# Altium PCB PCB_Cong_suat.PcbDoc
Units mil, origin at the board's own origin, x right, y up, seen from the top; angles counter-clockwise.
Board outline 3920 x 3890 mil, 2 copper layers (Top Layer, Bottom Layer); 52 components, 42 nets, 174 pads, 40 vias.
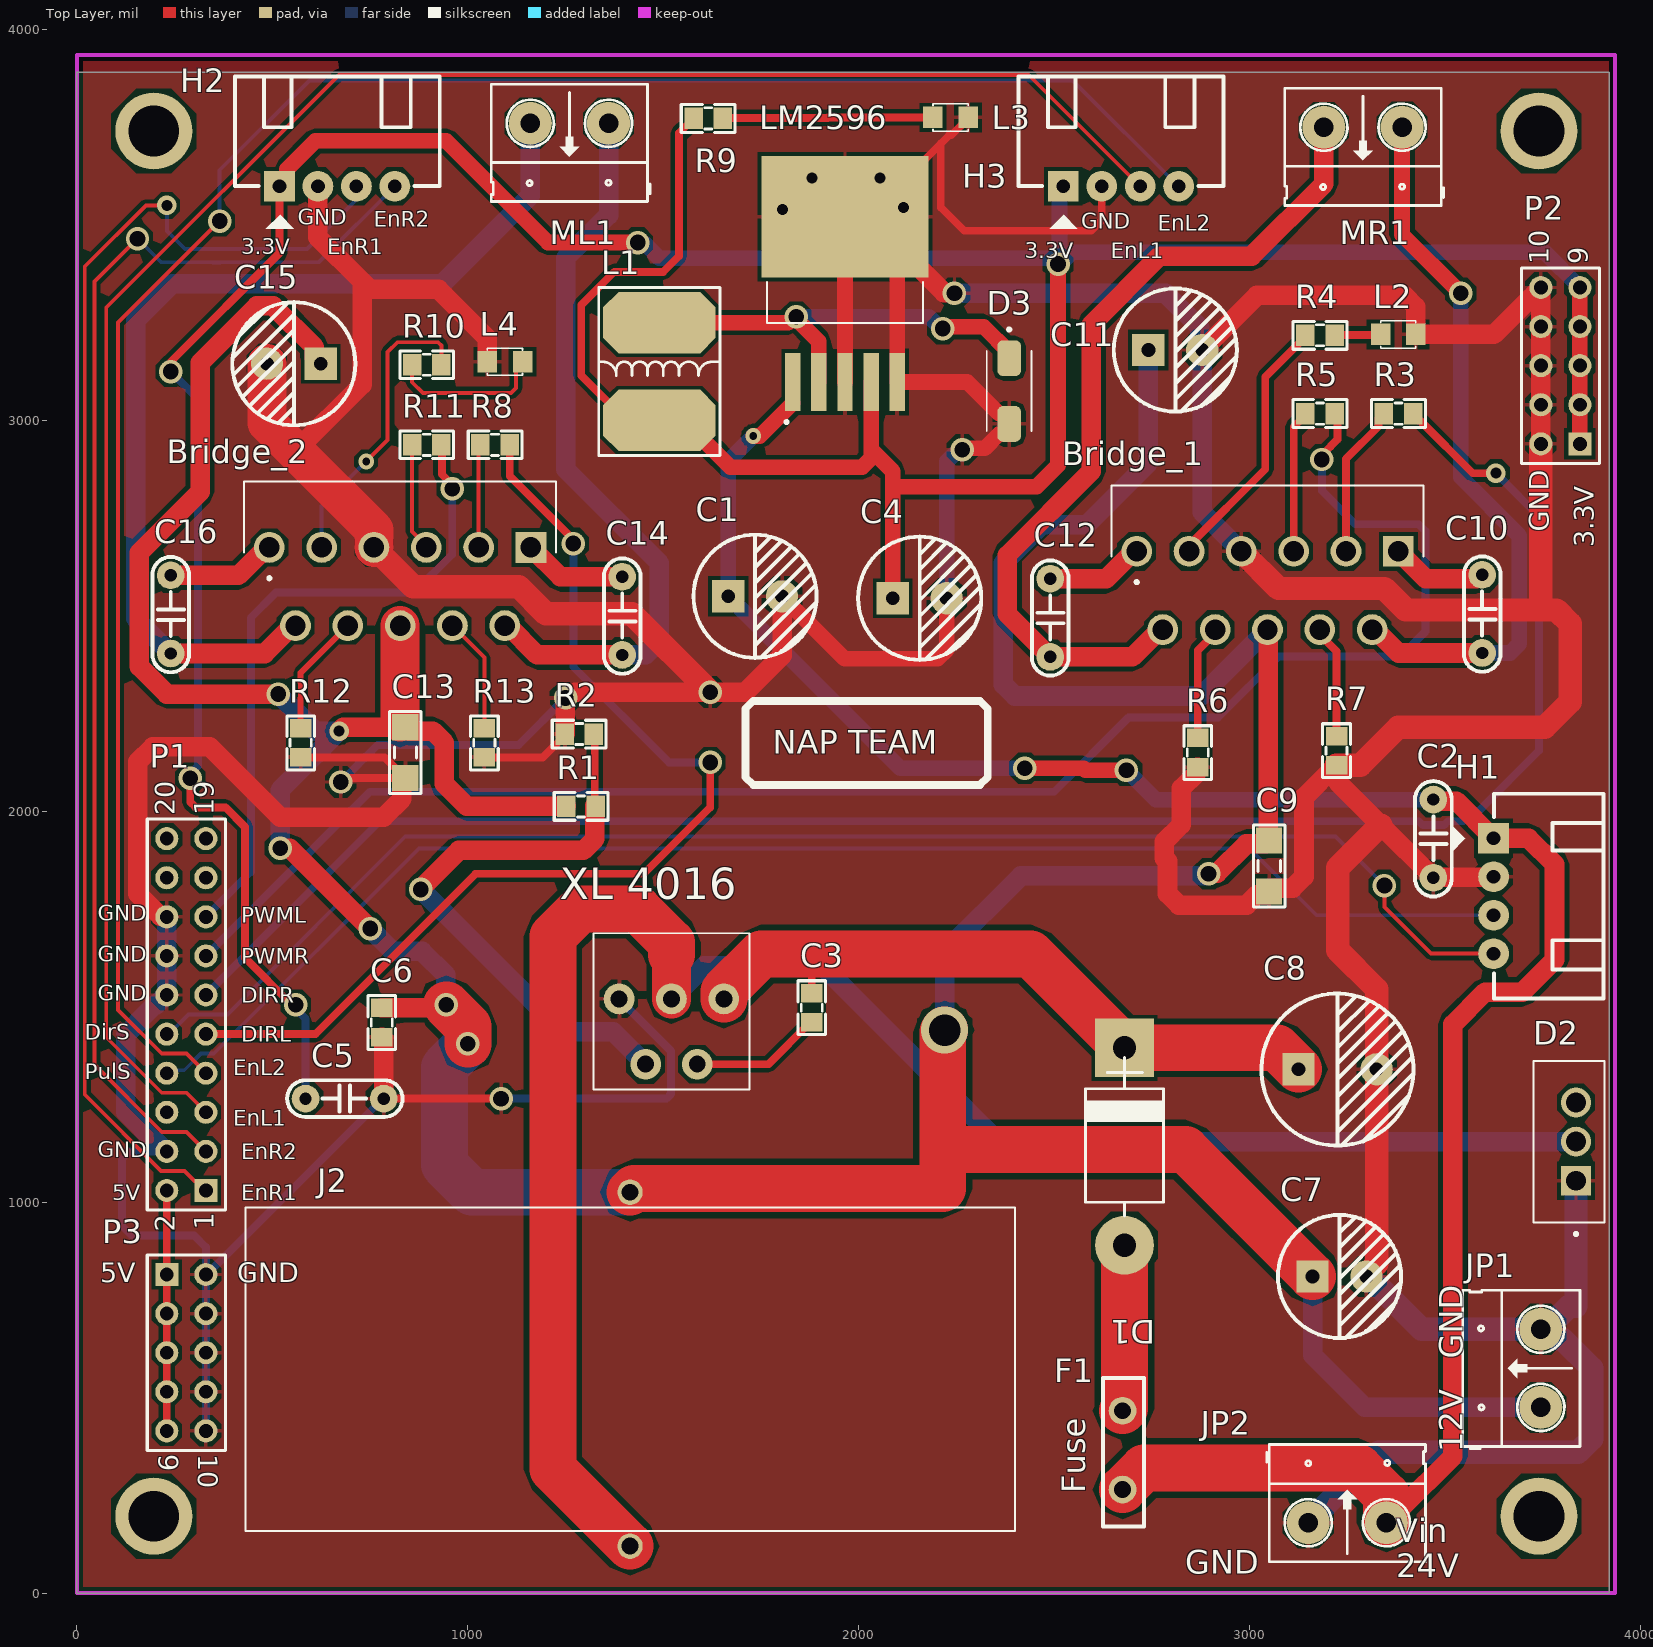
[diagram p0: Top Layer view]
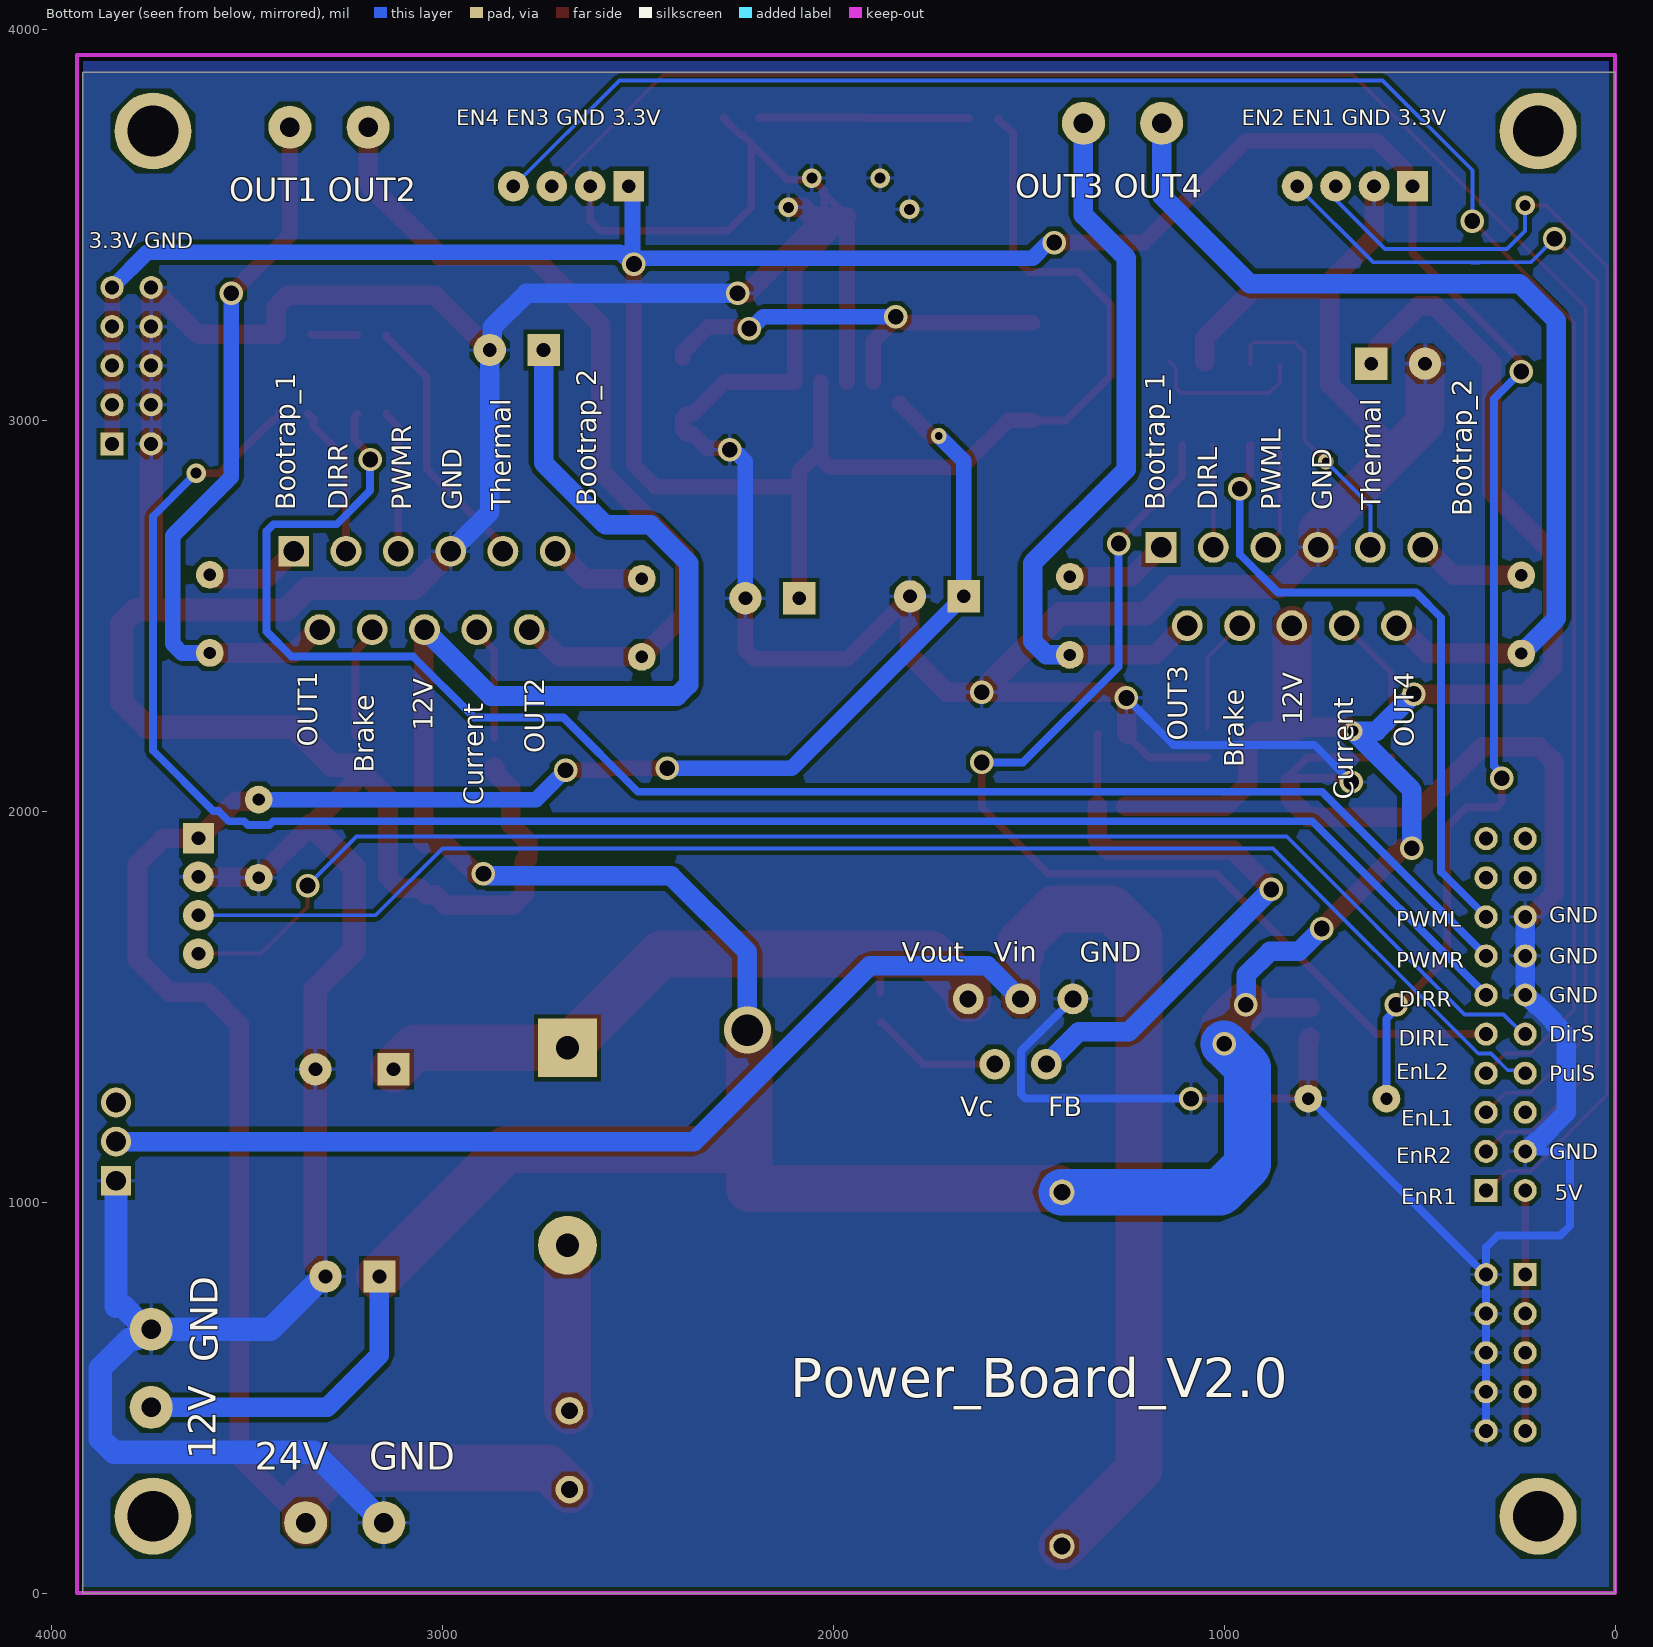
[diagram p1: Bottom Layer view, seen from below]
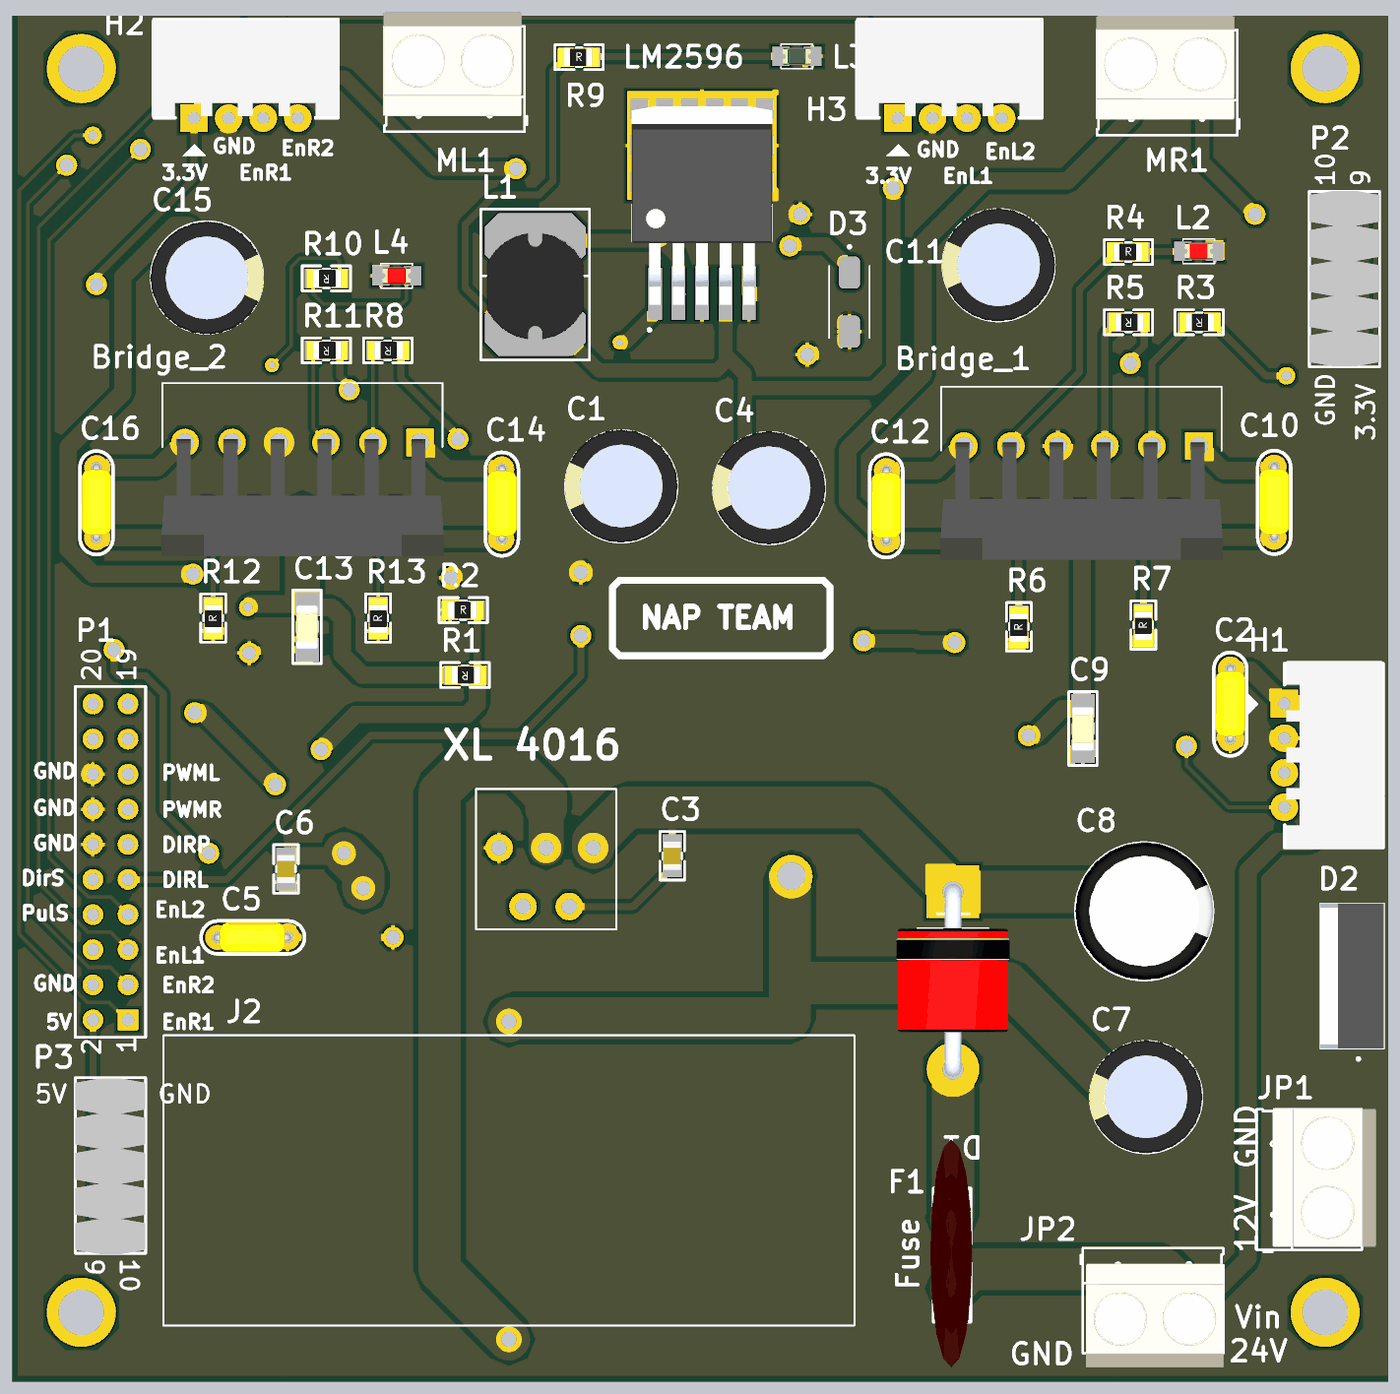
[diagram p2: 3D render of the assembled board from above, using the file's embedded part models]

## Layer stack, top to bottom
Top Solder: solder mask 0.4, Solder Resist, Dk 3.5
Top Layer: signal copper 1.4
Dielectric 1: dielectric 12.6, FR-4, Dk 4.8
Bottom Layer: signal copper 1.4
Bottom Solder: solder mask 0.4, Solder Resist, Dk 3.5

## Board outline
0,0 3920,0 3920,3890 0,3890

## Design rules (kind name [scope] priority, off if disabled: settings)
Clearance [All] p1: gap=10 ignorepadtopadclearanceinfootprint=FALSE
Height [All] p1: minheight=0 maxheight=5000 prefheight=500
PolygonConnect [All] p1: connectstyle=Relief reliefconductorwidth=10 reliefentries=4 polygonreliefangle="90 Angle" airgapwidth=10
RoutingVias [All] p1: holewidth=40 width=60 viastyle="Through Hole" minholewidth=40 minwidth=60 maxholewidth=40 maxwidth=60
SolderMaskExpansion [All] p1: expansion=4 istentingtop=FALSE
Width [All] p1: maxlimit=150 minlimit=10 preferedwidth=40
29 further rules are at their usual default settings.

## Components (designator, comment, footprint, x,y, rotation, side; value= is the part's Value field where it differs from the comment)
Bridge_1 "LMD18200T/NOPB" LMD18200 2711.14,2665 r0 top
Bridge_2 "LMD18200T/NOPB" LMD18200 492.28,2675 r0 top
C1 "470uF" "tu hoa 8mm" 1735,2550 r0 top
C2 "100nF" "tu tantalum dip5.08" 3470,1930 r270 top
C3 "105" "tu 0805" 1880.13,1497.57 r270 top
C4 "470uF" "tu hoa 8mm" 2156.1,2545 r0 top
C5 "100nF" "tu tantalum dip5.08" 685,1265 r0 top
C6 "105" "tu 0805" 780,1460 r270 top
C7 "1000uF" "tu hoa 8mm" 3230,810 r0 top
C8 "470uF" "tu hoa 10mm" 3225,1340 r0 top
C9 "100pF" "tu 1206" 3050,1860 r270 top
C10 "10nF" "tu tantalum dip5.08" 3595,2505 r270 top
C11 "220uF" "tu hoa 8mm" 2810,3180 r0 top
C12 "10nF" "tu tantalum dip5.08" 2490,2495 r270 top
C13 "100pF" "tu 1206" 840,2150 r270 top
C14 "10nF" "tu tantalum dip5.08" 1395,2500 r270 top
C15 "220uF" "tu hoa 8mm" 555,3145 r180 top
C16 "10nF" "tu tantalum dip5.08" 240,2503.68 r270 top
D1 "6A 1000V" "DIODE 7A" 2680,1120 r270 top
D2 "MBR10100CTH" TO254P1050X476X2020-3 3817.15,1155 r90 top
D3 "B340A-13-F" DIOM5226X240N 2385,3075 r270 top
F1 "10A 16V" Auto_Fuse 2675,250 r90 top
H1 "Stepper" "Header 4P DC 2.54" 3625,1930 r0 top
H2 "Encoder_R" "Header 4P DC 2.54" 519.15,3600 r90 top
H3 "Encoder_R" "Header 4P DC 2.54" 2524.15,3600 r90 top
J2 "470uH" DTPUA10 1415,120 r90 top
JP1 "Header 2_1" HED2 3745,475 r90 top value="Header 2"
JP2 "Header 2_1" HED2 3150,180 r0 top value="Header 2"
L1 "33uH SMD" "Cuon Cam 7x7x5" 1490,3275 r180 top
L2 "LED 0805" LED-0805-Red 3335,3220 r0 top
L3 "LED 0805" LED-0805-Green 2190,3775 r0 top
L4 "LED 0805" LED-0805-Red 1140,3150 r180 top
LM2596 "LM2596S-3.3V" TO170P1524X483-6N 1965,3350 r90 top (schematic designator VR1)
ML1 "Header 2_1" HED2 1360,3760 r180 top value="Header 2"
MR1 "Header 2_1" HED2 3390,3750 r180 top value="Header 2"
P1 "Header 10X2" HDR2X10 330,1030 r90 top
P2 "Header 5X2" HDR2X5 3845,2940 r90 top
P3 "Header 5X2" HDR2X5 230,815 r270 top
R1 "15k" "tro smd 0805" 1290,2010 r180 top
R2 "1.8k" "tro smd 0805" 1285,2200 r0 top
R3 "3.3k" "tro smd 0805" 3381.17,3015 r180 top
R4 "330R" "Tro SMD 0805" 3180,3220.06 r0 top
R5 "3.3k" "tro smd 0805" 3180,3015 r180 top
R6 "10k" "tro smd 0805" 2865,2150 r90 top
R7 "3.3k" "tro smd 0805" 3220,2155 r90 top
R8 "3.3k" "tro smd 0805" 1070,2935 r180 top
R9 "330R" "Tro SMD 0805" 1615,3775 r0 top
R10 "330R" "Tro SMD 0805" 895,3140 r180 top
R11 "3.3k" "tro smd 0805" 895,2935 r180 top
R12 "10k" "tro smd 0805" 570,2175 r90 top
R13 "3.3k" "tro smd 0805" 1040,2175 r90 top
"XL 4016" "XL4016" LM2576T2 1521,1520 r0 top (schematic designator J1)

## Footprints (in the part's own frame and the unit in brackets; to place one, negate y for a bottom-side part, rotate by r counter-clockwise, add the part's x,y. Pads: shape width x height; smd on the part's side, far side on the other; paste and mask are expansions set on the pad)
Auto_Fuse [mm]
  round 1.8 hole 1.1: 1(0.381,0) 2(5.5,0)
  silkscreen extent -2.03,-1.4 7.62,1.27, body extent -5.33,-1.52 11.18,1.52, height 26.91
"Cuon Cam 7x7x5" [mm] "Cuon Cam 7x7x5"
  oct 7.3x4 smd: 1(0,0.635) 2(0,6.985)
  silkscreen extent -3.94,-1.65 3.94,9.27, body extent -3.5,0.07 3.5,7.8, height 5.02
"DIODE 7A" [mil] "Diode 7A"
  round 150 hole 60: 1(230,0)
  rect 150x150 hole 60: 2(-275,0)
  silkscreen extent -250,-100 155,100, body extent -296,-161 251,161, height 319
DIOM5226X240N [mm]
  rrect50% 2.33x1.55 smd: A(2.135,0) C(-2.135,0)
  silkscreen extent -4.1,-1.46 2.6,1.46
DTPUA10 [mm]
  round 1.65 hole 1.1: P$1(0,0) P$2(23,0)
  silkscreen extent 1,-25 22,25
HDR2X5 [mm] "Connector; Header; 5x2 Position"
  rect 1.5x1.5 hole 0.9: 1(0,0)
  round 1.5 hole 0.9: 2(0,2.54) 3(2.54,0) 4(2.54,2.54) 5(5.08,0) 6(5.08,2.54) 7(7.62,0) 8(7.62,2.54) 9(10.16,0) 10(10.16,2.54)
  silkscreen extent -1.27,-1.27 11.43,3.81, body extent -1.22,-1.28 11.48,3.8, height 9.27
HDR2X10 [mm] "Connector; Header; 10x2 Position"
  rect 1.5x1.5 hole 0.9: 1(0,0)
  round 1.5 hole 0.9: 2(0,2.54) 3(2.54,0) 4(2.54,2.54) 5(5.08,0) 6(5.08,2.54) 7(7.62,0) 8(7.62,2.54) 9(10.16,0) 10(10.16,2.54) 11(12.7,0) 12(12.7,2.54) 13(15.24,0) 14(15.24,2.54) 15(17.78,0) 16(17.78,2.54) 17(20.32,0) 18(20.32,2.54) 19(22.86,0) 20(22.86,2.54)
  silkscreen extent -1.27,-1.27 24.13,3.81
"Header 4P DC 2.54" [mil]
  rect 78.74x78.74 hole 35: 1(-1,1)
  round 78.74 hole 35: 2(-1,-97.42) 3(-1,-195.85) 4(-1,-294.28)
  silkscreen extent -110,-409 280,115, body extent 5,-413 278,123, height 290
HED2 [mil] "Header 2, 2 pin, hight 300mil, Pin to Pin 200, Colour Green"
  round 110 hole 50: 1(0,0) 2(200,0)
  silkscreen extent -106,-100 300,200, body extent -92,-140 302,155, height 394
LED-0805-Green [mil]
  rect 50x55 smd: 1(0,0) 2(90,0)
  silkscreen extent 0,-35 90,35, body extent 5,-25 85,25, height 43
LED-0805-Red [mil]
  rect 50x55 smd: 1(0,0) 2(90,0)
  silkscreen extent 0,-35 90,35, body extent 5,-25 85,25, height 43
LM2576T2 [mm]
  round 2 hole 1.1: 1(-3.404,0) 2(-1.676,-4.242) 3(0,0) 4(1.676,-4.242) 5(3.404,0)
  silkscreen extent -5.08,-5.89 5.08,4.27
LMD18200 [mm]
  rect 2x2 hole 1.33: 1(17,0)
  round 2 hole 1.33: 2(15.3,-5.08) 3(13.6,0) 4(11.9,-5.08) 5(10.2,0) 6(8.5,-5.08) 7(6.8,0) 8(5.1,-5.08) 9(3.4,0) 10(1.7,-5.08) 11(0,0)
  silkscreen extent -1.64,-2.1 18.64,4.29, body extent -1.69,-8.24 18.71,0.25, height 17.79
TO170P1524X483-6N [mm]
  rect 3.79x0.99 smd: 1(-6.4,3.4) 2(-6.4,1.7) 3(-6.4,0) 4(-6.4,-1.7) 5(-6.4,-3.4)
  rect 7.88x10.84 smd paste-6: 6(4.35,0)
  silkscreen extent -9.1,-5.08 0.09,5.08, body extent -7.18,-5.08 7.18,5.08, height 4.65
TO254P1050X476X2020-3 [mm]
  rect 1.94x1.94 hole 1.29: 1(-2.54,-0.453)
  round 1.94 hole 1.29: 2(0,-0.453) 3(2.54,-0.453)
  silkscreen extent -6.1,-2.29 5.25,2.29, body extent -5.25,-2.29 5.25,2.3, height 20.2
"tro smd 0805" [mm]
  rect 1.2x1.4 smd: 1(-0.946,-0.061) 2(0.954,-0.061)
  silkscreen extent -1.75,-0.97 1.75,0.84, body extent -1.56,-0.76 1.44,0.64, height 0.53
"Tro SMD 0805" [mm]
  rect 1.2x1.4 smd: 1(-0.946,-0.061) 2(0.954,-0.061)
  silkscreen extent -1.75,-0.97 1.75,0.84, body extent -1.56,-0.76 1.44,0.64, height 0.53
"tu 0805" [mm] "Compoment SMD 80x50mil"
  rect 1.2x1.4 smd: 1(-0.946,-0.003) 2(0.954,-0.003)
  silkscreen extent -1.75,-0.89 1.75,0.89, body extent -1.01,-0.64 1.01,0.63, height 0.61
"tu 1206" [mm]
  rect 1.7x1.7 smd: 1(-1.65,0) 2(1.65,0)
  silkscreen extent -2.67,-1.02 2.67,1.02, body extent -1.57,-0.8 1.63,0.8, height 0.94
"tu hoa 8mm" [mm]
  rect 2.1x2.1 hole 0.9: 1(-1.75,0)
  round 2.1 hole 0.9: 2(1.75,0)
  silkscreen extent -4,-4 4,4, body extent -4.1,-4.07 4.1,4.13, height 13.81
"tu hoa 10mm" [mm]
  rect 2.1x2.1 hole 0.9: 1(-2.54,0)
  round 2.1 hole 0.9: 2(2.54,0)
  silkscreen extent -4.95,-4.96 4.93,4.92, body extent -5,-5 4.97,5, height 20.01
"tu tantalum dip5.08" [mm]
  round 1.8 hole 0.8: 1(-2.54,0) 2(2.54,0)
  silkscreen extent -3.74,-1.2 3.76,1.2, body extent -2.82,-1.08 2.77,1.08, height 6.27

## Part data
Bridge_1 Bridge_2: Package=None, Availability=Unavailable, MP=LMD18200T/NOPB, Price=None
C1 C4: library part "Tu Hoa 470uF 16V 8x11", "Cắm", Chung_Loai=Cắm, Don_Vi=Con, Ma_Hang=MH006550, So_Chan=2, Ten_Linh_Kien="Tụ Hóa 470uF 16V 8x11MM"
C2 C5: library part "Tu tantalum 100nF 50V 20% DIP5.08", "Cắm", Chung_Loai=Cắm, Don_Vi=Con, Ma_Hang=MH003955, So_Chan=2, Ten_Linh_Kien="Tụ tantalum 104-100nF 50V 20% DIP5.08 (sứ vàng)(10PCS)"
C3 C6: library part "Tu 0805 105 50V 10%", "Dán", Chung_Loai=Dán, Don_Vi=Con, Ma_Hang=MH004552, So_Chan=2, Ten_Linh_Kien="Tụ 0805 105-1uF 10% 50V"
C7: library part "Tu Hoa 1000uF 16V 8x20", "Cắm", Chung_Loai=Cắm, Don_Vi=Con, Ma_Hang=MH008300, So_Chan=2, Ten_Linh_Kien="Tụ Hóa 1000uF 16V 8x20MM"
C8: library part "Tu Hoa 470uF 35V 10x15", "Cắm", Chung_Loai=Cắm, Don_Vi=Con, Ma_Hang=MH002204, So_Chan=2, Ten_Linh_Kien="Tụ Hóa 470uF 35V 10x15MM"
C9 C13: library part "Tu 1206 100pF 50V 5%", "Dán", Chung_Loai=Dán, Don_Vi=Con, Ma_Hang=MH008101, So_Chan=2, Ten_Linh_Kien="Tụ 1206 100P 5% 50V"
C10 C12 C14 C16: library part "Tu tantalum 10nF DIP5.08", "Cắm", Chung_Loai=Cắm, Don_Vi=Con, Ma_Hang=MH002105, So_Chan=2, Ten_Linh_Kien="Tụ tantalum 103-10nF DIP5.08 (sứ vàng)(10PCS)"
C11 C15: library part "Tu Hoa 220uF 35V 8x12", "Cắm", Chung_Loai=Cắm, Don_Vi=Con, Ma_Hang=MH006553, So_Chan=2, Ten_Linh_Kien="Tụ Hóa 220uF 35V 8x12MM"
D1: library part "Diode 6A 1000V", "Cắm", Chung_Loai=Cắm, Don_Vi=Con, Ma_Hang=MH006103, Ten_Linh_Kien="Diode 6A10 6A 1000V (DIP)"
D2: "10A, 100V, Schottky Rectifier", Package="TO-220AB Taiwan Semiconductor", Availability="Not in stock", Check_prices=https://www.snapeda.com/parts/MBR10100CTH/Taiwan+Semiconductor/view-part/?ref=eda, MF="Taiwan Semiconductor", MP=MBR10100CTH, Price=None, SnapEDA_Link=https://www.snapeda.com/parts/MBR10100CTH/Taiwan+Semiconductor/view-part/?ref=snap
D3: "Diode Schottky 40V 3A Surface Mount SMA", Package="DO-214 Diodes Inc.", Availability=Unavailable, MF="Diodes Inc.", MP=B340A-13-F, Price=None, SnapEDA_Link=https://www.snapeda.com/parts/B340A-13-F/Diodes%20Inc./view-part/78704/?ref=snap
F1: library part Auto_Fuse_10A
H1 H2 H3: library part "Header 4P 2.54 Duc Cong", "Cắm", Chung_Loai=Cắm, Don_Vi=Con, Ma_Hang=MH001310, Ten_Linh_Kien="Header 4P XH2.54-4P Đực Cong"
J2: library part DTPU100A10, Package=None, Availability=Unavailable, MP=DTPU100A10, Price=None
JP1 JP2 ML1 MR1: "Header, 2-Pin", Manufacturer="Generic Components", Class=Connector
L1: library part "CUON CAM 47uH SMD", "Dán", Chung_Loai=Dán, Don_Vi=Con, Ma_Hang=MH004211, Ten_Linh_Kien="Cuộn Cảm 47uH 7x7x4MM CD74R"
L2 L4: library part "LED 0805 Do", "Dán", Chung_Loai=Dán, Don_Vi=Con, Ma_Hang=MH000897, Ten_Linh_Kien="LED 0805 Màu Đỏ (Red)"
L3: library part "LED 0805 Xanh La", "Dán", Chung_Loai=Dán, Don_Vi=Con, Ma_Hang=MH002326, Ten_Linh_Kien="LED 0805 Màu Xanh Lá (Green)"
LM2596: library part LM2596S-5.0, "SIMPLE SWITCHER&reg; 4.5V to 40V, 3A Low Component Count Step-Down Regulator", Package="TO-263-5 Texas Instruments", Availability="In Stock", Check_prices=https://www.snapeda.com/parts/LM2596S-5.0/NOPB/Texas+Instruments/view-part/?ref=eda, MF="Texas Instruments", MP=LM2596S-5.0/NOPB, Price=None, Purchase-URL=https://pricing.snapeda.com/search/part/LM2596S-5.0/NOPB/?ref=eda, SnapEDA_Link=https://www.snapeda.com/parts/LM2596S-5.0/NOPB/Texas+Instruments/view-part/?ref=snap
P1: "Header, 10-Pin, Dual row", LatestRevisionDate=17-Jul-2002, LatestRevisionNote="Re-released for DXP Platform.", Publisher="Altium Limited"
P2 P3: "Header, 5-Pin, Dual row", LatestRevisionDate=17-Jul-2002, LatestRevisionNote="Re-released for DXP Platform.", Publisher="Altium Limited"
R1: library part "Tro 0805 5% 15k", "Dán", Chung_Loai=Dán, Don_Vi=Con, Ma_Hang=MH005243, So_Chan=2, Ten_Linh_Kien="Trở 0805 5% 15k"
R2: library part "Tro 0805 5% 1.8k", "Dán", Chung_Loai=Dán, Don_Vi=Con, Ma_Hang=MH005233, So_Chan=2, Ten_Linh_Kien="Trở 0805 5% 1.8k"
R3 R5 R7 R8 R11 R13: library part "Tro 0805 5% 3.3k", "Dán", Chung_Loai=Dán, Don_Vi=Con, Ma_Hang=MH005305, So_Chan=2, Ten_Linh_Kien="Trở 0805 5% 3.3k"
R4 R9 R10: library part "Tro 0805 5% 330R", "Dán", Chung_Loai=Dán, Don_Vi=Con, Ma_Hang=MH005337, So_Chan=2, Ten_Linh_Kien="Trở 0805 5% 330R"
R6 R12: library part "Tro 0805 5% 10k", "Dán", Chung_Loai=Dán, Don_Vi=Con, Ma_Hang=MH005239, So_Chan=2, Ten_Linh_Kien="Trở 0805 5% 10k"
"XL 4016": "The XL4016 is a 180 KHz fixed frequencyPWM buck (step-down) DC/DC converter,capable of driving a 8A load with highefficiency, low ripple and excellent line and load regulation.", Package=None, Availability="Not in stock", Check_prices=https://www.snapeda.com/parts/XL4016/XLSEMI/view-part/?ref=eda, MF=XLSEMI, MP=XL4016, Price=None, SnapEDA_Link=https://www.snapeda.com/parts/XL4016/XLSEMI/view-part/?ref=snap

## Free pads (board coordinates)
  round 196.85 hole 129.92: 4(196.85,196.85) 4(196.85,3740.16) 4(3740.16,196.85) 4(3740.16,3740.16)

## Via types
v1: diameter 60, hole 40, Top Layer to Bottom Layer, 30 vias
v2: diameter 50, hole 28, Top Layer to Bottom Layer, 7 vias
v3: diameter 40, hole 20, Top Layer to Bottom Layer, 2 vias
v4: diameter 120, hole 80, Top Layer to Bottom Layer, 1 vias

## Nets (pads, with @x,y where several pads share a name; then routed paths per layer and width w, separated by ;. In a path a pad name is that pad's centre, name@x,y a point inside that pad or via, vN(x,y) a via of type N, cw(c..) or ccw(c..) an arc to the next point about the centre after c; other vN are vias at no path point)
3.3V: C4.1 C5.1 H2.1 H3.1 L1.2 LM2596.4 P2.1 P2.3 P2.5 P2.7 P2.9 R9.1 | length 10065.7
  Top Layer w20: v1(240,3125) 240,3150 518.15,3428.15 H2.1 ; v1(290,2085) 290,2023.69 303.69,2010 380,2010 430,1960 430,1625 550,1505 v1(560,1505) ; L1.2 1405,3000 1290,3115 1290,3295 1375,3380 1500,3380 1540,3420 1540,3734.83 1560.21,3755.05 1564.15,3755.05 1577.77,3768.67 R9.1
  Top Layer w40: H2.1 537.52,3618.37 537.52,3642.52 610,3715 945,3715 1205,3455 v1(1435,3455) ; L1.2 1552.13,3000 1672.13,2880 2008.5,2880 2031.93,2903.43 2031.93,2925 ; LM2596.4 2031.93,2925 ; C4.1 2087.2,2830 ; v1(2510,3400) 2510,2885 2455,2830 2087.2,2830 ; P2.1 P2.3 P2.5 P2.7 P2.9 ; 2031.93,2925 2087.2,2869.72 2087.2,2830
  Bottom Layer w20: v1(240,3125) 310,3055 310,2115.82 290,2095.82 v1(290,2085) ; v1(560,1505) 560,1494.18 585,1469.18 C5.1
  Bottom Layer w40: v1(1435,3455) 1438.83,3451.17 1453.83,3451.17 1490,3415 v1@2489.59,3415 ; H3.1 2513.83,3589.68 2513.83,3403.83 v1(2510,3400) 2515.41,3400 2545.41,3430 3755,3430 P2.9
5V: P1.2 P3.1 P3.3 P3.5 P3.7 P3.9 | length 615
  Top Layer w20: P3.9 P3.7 P3.5 P3.3 P3.1 P1.2
+12: Bridge_1.6 Bridge_2.6 C6.1 C7.1 C9.1 C11.1 C13.1 C15.1 J2.P$2 JP1.1 R1.2 | length 11656.4
  Top Layer w50: v1(515,2300) 229.93,2300 159.57,2370.36 159.57,2661.59 315,2817.02 315,3147.22 460.68,3292.9 502.1,3292.9 607.56,3187.44 607.56,3161.34 C15.1 ; v1(520,1905) 545,1905 v1(750,1700) ; v2(670.99,2204.96) 680.99,2214.96 C13.1 ; C6.1 934.52,1497.23 942.29,1505 v1(945,1505) ; C13.1@826.93,2228.03 C13.1 ; Bridge_2.6 Bridge_2.6@832.43,2469.5 ; R1.2 997.61,2012.39 940,2070 940,2175.71 910.71,2205 849.96,2205 C13.1 ; v1(2895,1840) 2896.91,1841.91 2916.91,1841.91 2991.5,1916.5 3041.54,1916.5 C9.1 ; Bridge_1.6 3047.89,2462.89 C9.1@3047.89,1922.85
  Top Layer w100: C13.1@826.93,2228.03 Bridge_2.6
  Top Layer w120: v1(945,1505) 1000,1450 v1(1000,1405) ; J2.P$2 1424.49,1035 2215,1035 2215,1135 ; v4(2220,1440) 2215,1435 2215,1135 ; C7.1 2836.1,1135 2215,1135
  Bottom Layer w50: v1(515,2300) 610.04,2204.96 v2(670.99,2204.96) 520,2053.97 v1(520,1905) ; v1(750,1700) 808.09,1641.91 883.09,1641.91 943.09,1581.91 943.09,1506.91 v1(945,1505) ; v4(2220,1440) 2220,1640 2415,1835 2887.29,1835 2892.29,1840 v1(2895,1840) ; C11.1 2741.1,2891.1 2582.5,2732.5 2467.5,2732.5 2370,2635 2370,2324.29 2399.29,2295 2875.79,2295 Bridge_1.6 ; C7.1 3161.1,608.9 3295,475 JP1.1
  Bottom Layer w120: v1(1000,1405) 940,1345 940,1095.81 1010.29,1025.51 J2.P$2
DIR_L: P1.9 R8.1 | length 2735.7
  Top Layer w20: P1.9 610,1430 1020,1840 1450,1840 1620,2010 v1(1620,2125) ; R8.1 1107.23,2857.77 1275,2690 v1(1270,2685)
  Bottom Layer w20: v1(1270,2685) 1270,2370 1515,2125 v1(1620,2125)
DIR_R: P1.11 R3.1 | length 4700.9
  Top Layer w20: R3.1 3418.39,3013.46 3432.02,2999.83 3435.95,2999.83 3570.79,2865 v2(3630,2865)
  Bottom Layer w20: P1.11 774.67,1974.67 3392.83,1974.67 3392.93,1974.57 3432.9,1974.57 3442.9,1964.57 3497.1,1964.57 3507.1,1974.57 3546.4,1974.57 3572.2,2000.37 3585.37,2000.37 3740,2155 3740,2755 3639.8,2855.2 3639.8,2859.8 v2@3640,2860
DIR_STEPPER: H1.4 P1.10 | length 3759.4
  Top Layer w10: v1(3345,1810) 3345,1755 3464.28,1635.72 H1.4
  Bottom Layer w10: P1.10 235,1430 285,1480 385,1480 840,1935 3220,1935 v1(3345,1810)
Encoder_L1: H3.3 P1.5 | length 5210.8
  Top Layer w10: P1.5 280,1280 217.03,1280 75,1422.03 75,3288.55 670.45,3884 2435,3884 H3.3
Encoder_L2: H3.4 P1.7 | length 5208.7
  Top Layer w10: P1.7 280,1380 217.03,1380 105,1492.03 105,3250 v1(365,3510)
  Bottom Layer w10: v1(365,3510) 365,3640 595,3870 2547.43,3870 H3.4
Encoder_R1: H2.3 P1.1 | length 3460.4
  Top Layer w10: v2(230,3550) 176.36,3550 20,3393.64 20,1275 215,1080 275,1080 300.47,1054.53 305.47,1054.53 P1.1
  Bottom Layer w10: v2(230,3550) 230,3485 276.32,3438.68 588.68,3438.68 715,3565 H2.3
Encoder_R2: H2.4 P1.3 | length 3299.2
  Top Layer w10: v1(155,3465) 45,3355 45,1352.03 217.03,1180 280,1180 P1.3
  Bottom Layer w10: v1(155,3465) 212.07,3407.93 215,3405 348.25,3403.48 365.91,3403.48 619.43,3405 622.35,3407.93 H2.4
GND: "XL 4016.1" Bridge_1.7 Bridge_2.7 C1.2 C2.2 C4.2 C5.2 C6.2 C7.2 C8.2 C9.2 C11.2 C13.2 C15.2 D2.1 D3.A H1.2 H2.2 H3.2 JP1.2 JP2.1 L2.2 L3.2 L4.2 LM2596.3 LM2596.5 LM2596.6 P1.4 P1.12 P1.14 P1.16 P2.2 P2.4 P2.6 P2.8 P2.10 P3.2 P3.4 P3.6 P3.8 P3.10 R2.1 R6.1 R7.1 R12.1 R13.1 | length 23910.5
  Top Layer w20: R12.1 787.27,2137.77 831.54,2093.5 C13.2@831.54,2085.04 ; v1(675,2075) 685.04,2085.04 C13.2@831.54,2085.04 ; C5.2 v1(1085,1265) ; C13.2@831.54,2076.57 C13.2@831.54,2085.04 ; C13.2 C13.2@831.54,2085.04 ; R13.1 1191.87,2137.77 1247.77,2193.67 R2.1 ; LM2596.6@2023.27,3521.26 2023.27,3588.27 v2(2055,3620) ; LM2596.6@2059.37,3615.63 2117.64,3615.63 2210,3707.99 ; L3.2 2280,3772.5 2236.72,3729.22 2231.22,3729.22 2210,3707.99 ; H3.2 2621.57,3511.57 2595,3485 2270,3485 2210,3545 2210,3707.99 ; LM2596.6 2027.64,3583.9 LM2596.6
  Top Layer w40: C1.2 1963.9,2390 2201.57,2390 2225,2413.43 C4.2 ; LM2596.3 LM2596.6 2098.86,3387.4 LM2596.5 2277.91,3098.03 2359.13,3016.81 2374.49,3016.81 2385,3006.3 D3.A 2385,2975.59 2374.49,2965.08 2359.13,2965.08 2322.88,2928.83 2268.83,2928.83 v1(2265,2925)
  Top Layer w50: P1.16 228.27,1731.73 213.27,1731.73 155.47,1789.53 155.47,2126.18 194.29,2165 340,2165 520,1985 785,1985 831.54,2031.54 C13.2@831.54,2076.57 ; 557.5,2922.5 560.64,2922.5 730,3091.86 730,3355 ; H2.2 616.58,3468.43 730,3355 ; C6.2 781.05,1422.43 785,1418.47 C5.2 ; L4.2 1050,3210 925,3335 750,3335 730,3355 ; R2.1 1248.89,2198.72 1248.89,2288.89 v1(1250,2290) 1252.71,2290 1267.71,2305 v1(1620,2305) 1710,2305 1803.9,2398.9 C1.2 ; LM2596.6 LM2596.6@2023.27,3521.26 ; v2(2115,3545) 2077.48,3545 2053.74,3521.26 LM2596.6@2023.27,3521.26 ; v1(2245,3325) 2243.09,3326.91 2217.61,3326.91 2038.5,3506.02 LM2596.6@2023.27,3521.26 ; R6.1 2866.21,2112.77 2864.83,2111.39 2864.83,2098.32 2825.13,2058.61 2825.13,1965.57 2781.45,1921.89 2781.45,1880.47 2790,1871.92 2790,1789.29 2819.29,1760 2992.25,1760 3018.82,1786.57 C9.2@3041.54,1786.57 ; C11.2 3018.9,3320 3395.71,3320 3425,3290.71 L2.2 3625,3220 P2.10 P2.8 P2.6 P2.4 P2.2 ; C9.2 3058.46,1803.5 3109.86,1803.5 3139.15,1832.79 3139.15,2035.71 R7.1@3221.21,2117.77 ; R7.1@3223.57,2117.77 3224.95,2116.39 3224.95,2075.05 3335,1965 C2.2 3471.29,1831.29 3622.71,1831.29 H1.2
  Top Layer w60: Bridge_2.7 860,2575 1130,2575 1200,2505 1420,2505 v1(1620,2305) ; Bridge_1.7 3073.86,2570 3345,2570 3400,2515 3745,2515 ; R7.1@3221.21,2117.77 R7.1 3223.57,2117.77 3282.77,2117.77 3380,2215 3755,2215 3820,2280 3820,2479.85 3784.85,2515 3745,2515 ; C7.2 3298.9,816.14 3325,842.24 C8.2 3325,1545.07 3225,1645.07 3225,1855 3335,1965 ; P2.2 3745,2515
  Top Layer w100: C15.2 486.1,2993.9 557.5,2922.5 760,2720 Bridge_2.7
  Bottom Layer w20: P1.4 227.55,1130 135,1130 115,1110 115,940 140,915 300,915 330,885 P3.2 ; P3.10 P3.8 P3.6 P3.4 P3.2 ; v1(675,2075) 770,2170 1130,2170 v1(1250,2290) ; C5.2 782.5,1265 332.5,815 P3.2 ; v1(1085,1265) 1508.28,1265 1520,1276.72 1520,1387 1387,1520
  Bottom Layer w40: C4.2 2225,2895 2255,2925 v1(2265,2925)
  Bottom Layer w50: P1.4@227.55,1130 202.08,1155.47 199.13,1155.47 125,1229.6 125,1427.45 155.47,1457.92 155.47,1460.87 199.13,1504.53 202.08,1504.53 227.55,1530 P1.12 P1.14 P1.16 ; v1(2245,3325) 2785,3325 2872.65,3237.35 2872.65,3186.25 C11.2 2878.9,2764.96 Bridge_1.7
  Bottom Layer w60: JP2.1 3330,360 3839.85,360 3875,395.15 3875,575 3800,650 3783.53,650 JP1.2@3758.53,675 ; C7.2 3305,810 3440,675 JP1.2 ; D2.1 3834.98,733.51 3817.04,733.51 JP1.2@3758.53,675 ; JP1.2 JP1.2@3758.53,675 ; JP1.2 JP1.2@3758.53,675
  other v2: 1805,3540 1880,3620
ML1: Bridge_2.2 C14.2 ML1.1 | length 1910.9
  Top Layer w50: Bridge_2.2 1102.42,2475 1177.42,2400 C14.2
  Bottom Layer w50: ML1.1 1360,3525 1250,3415 1250,2875 1490,2635 1490,2435 1455,2400 C14.2
ML2: Bridge_2.10 C16.2 ML1.2 | length 2564.9
  Top Layer w50: C16.2 480.11,2403.68 551.44,2475 Bridge_2.10
  Bottom Layer w50: C16.2 150,2493.68 150,3255 245,3350 935,3350 1160,3575 ML1.2
MR1: Bridge_1.2 C10.2 MR1.1 | length 1856.9
  Top Layer w40: MR1.1 3390,3475 v1(3540,3325)
  Top Layer w50: Bridge_1.2 3321.28,2465 3381.28,2405 C10.2
  Bottom Layer w40: v1(3540,3325) 3540,2855 3690,2705 3690,2428.43 3666.57,2405 C10.2
MR2: Bridge_1.10 C12.2 MR1.2 | length 2190.8
  Top Layer w50: Bridge_1.10 2770.29,2465 2700.29,2395 C12.2 2380,2505 2380,2655 2595,2870 2595,3245 2770,3420 3005,3420 3190,3605 MR1.2
NetBridge_1_1: Bridge_1.1 C10.1 | length 247.7
  Top Layer w50: Bridge_1.1 3450.43,2595 3579.35,2595 3589.35,2605 C10.1
NetBridge_1_3: Bridge_1.3 R3.2 | length 392.6
  Top Layer w20: Bridge_1.3 3246.57,2901.57 3329.97,2984.97 3329.97,3003.77 R3.2
NetBridge_1_4: Bridge_1.4 R7.2 | length 290.1
  Top Layer w20: Bridge_1.4 3179.65,2452.39 3222.39,2409.64 R7.2
NetBridge_1_5: Bridge_1.5 R5.2 | length 364.7
  Top Layer w20: Bridge_1.5 3112.72,2983.75 3142.43,3013.46 R5.2
NetBridge_1_8: Bridge_1.8 R6.2 | length 295.9
  Top Layer w20: R6.2 2867.39,2411.43 2911.93,2455.97 Bridge_1.8
NetBridge_1_9: Bridge_1.9 R4.1 | length 676
  Top Layer w20: Bridge_1.9 2845,2680 3040,2875 3040,3110.96 3142.77,3213.73 R4.1
NetBridge_1_11: Bridge_1.11 C12.1 | length 250.1
  Top Layer w50: C12.1 2633.36,2595 2703.36,2665 Bridge_1.11
NetBridge_2_1: Bridge_2.1 C14.1 | length 264.5
  Top Layer w50: Bridge_2.1 1236.57,2600 C14.1
NetBridge_2_3: Bridge_2.3 R8.2 | length 264.3
  Top Layer w10: Bridge_2.3 1027.72,2932.1 1027.72,2932.69 R8.2
NetBridge_2_4: Bridge_2.4 R13.2 | length 296.2
  Top Layer w10: Bridge_2.4 1042.39,2393.39 R13.2
NetBridge_2_5: Bridge_2.5 R11.2 | length 277.5
  Top Layer w10: R11.2 857.43,2715.46 893.86,2679.02 Bridge_2.5
NetBridge_2_8: Bridge_2.8 R12.2 | length 312.5
  Top Layer w15: R12.2 572.39,2290.22 572.5,2290.32 572.5,2329.68 572.39,2329.78 572.39,2354.32 Bridge_2.8
NetBridge_2_9: Bridge_2.9 R10.1 | length 770.2
  Top Layer w10: v3(740,2895) 795,2950 795,3175 820,3200 923.86,3200 932.23,3191.63 R10.1
  Bottom Layer w10: Bridge_2.9 626.14,2781.14 v3(740,2895)
NetBridge_2_11: Bridge_2.11 C16.1 | length 281.8
  Top Layer w50: C16.1 413.18,2603.68 484.51,2675 Bridge_2.11
NetC3_1: "XL 4016.5" C3.1 C8.1 D1.2 | length 1753.4
  Top Layer w20: C3.1 1880,1630 1885,1635
  Top Layer w120: 1655,1520 1655,1539.35 1750.65,1635 1885,1635 2440,1635 D1.2 3070,1395 C8.1
NetC3_2: "XL 4016.4" C3.2 | length 337.3
  Top Layer w20: 1587,1353 1769.06,1353 1876.06,1460 C3.2
NetD1_1: D1.1 F1.2 | length 429.1
  Top Layer w50: D1.1@2677.5,887.5 D1.1
  Top Layer w120: F1.2 2680,471.54 D1.1
NetD2_2: "XL 4016.3" D2.2 J2.P$1 | length 4688.6
  Top Layer w100: 1521,1520 1521,1634
  Top Layer w120: J2.P$1 1217.63,317.37 1217.63,1679.71 1287.92,1750 1435,1750 1521,1664 1521,1634
  Bottom Layer w50: 1521,1520 1605.37,1604.37 1907.14,1604.37 2356.51,1155 D2.2
NetD3_C: D3.C L1.1 LM2596.2 | length 1149.3
  Top Layer w40: L1.1 1819.59,3250 1834.59,3265 v1(1840,3265) 1840,3259.59 1897.56,3202.03 1897.56,3098.54 LM2596.2 ; v1(2215,3235) 2220,3240 2319.41,3240 2385,3174.41 D3.C
  Bottom Layer w40: v1(1840,3265) 2179.59,3265 2209.59,3235 v1(2215,3235)
NetJ1_2: "XL 4016.2" R1.1 R2.2 | length 1529.5
  Top Layer w20: R2.2 1324.9,2195.28 R1.1@1324.9,2014.72
  Top Layer w50: v1(880,1800) 880,1802.71 977.29,1900 1295.61,1900 1324.9,1929.29 R1.1@1324.9,2014.72
  Bottom Layer w50: v1(880,1800) 1244.37,1435.63 1372.37,1435.63 1455,1353
NetL2_1: L2.1 R4.2 | length 118.4
  Top Layer w20: R4.2 3218.74,3218.83 3333.83,3218.83 L2.1
NetL3_1: L3.1 R9.2 | length 538.4
  Top Layer w20: R9.2 1653.77,3773.8 1920,3773.8 1921.2,3775 L3.1
NetL4_1: L4.1 R10.2 | length 401.2
  Top Layer w10: R10.2 857.43,3097.57 885,3070 1110,3070 1123.36,3083.36 1123.36,3133.36 L4.1
Pin_24V: C1.1 C2.1 F1.1 H1.1 JP2.2 LM2596.1 | length 5684.7
  Top Layer w40: v3(1730,2960) 1747.2,2960 LM2596.1@1830.63,3043.43 ; v1(2425,2110) 2575,2110 2580,2105 v1(2685,2105)
  Top Layer w50: JP2.2 3384.85,214.85 3520,350 3520,1455 3602.5,1537.5 3697.5,1537.5 3780,1620 3780,1865 3714,1931 H1.1 3528.99,2026.01 3473.99,2026.01 C2.1
  Top Layer w120: F1.1 2730,320 3279.71,320 3350,249.71 JP2.2
  Bottom Layer w40: v3(1730,2960) 1666.1,2896.1 C1.1 2106.1,2110 v1(2425,2110) ; v1(2685,2105) 2760,2030 C2.1
PULSE_STEPPER: H1.3 P1.8 | length 3702.9
  Bottom Layer w10: P1.8 237.5,1337.5 274.53,1337.5 317.03,1380 350,1380 875,1905 3000,1905 3170.85,1734.15 H1.3
PWML: P1.15 R11.1 | length 1686.5
  Top Layer w20: R11.1 933.61,2936.01 933.61,2862.21 960,2835.82 v1(960,2825)
  Bottom Layer w20: P1.15 445,1845 445,2495 509.51,2559.51 862.33,2559.51 960,2657.18 v1(960,2825)
PWMR: P1.13 R5.1 | length 4245.2
  Top Layer w20: v1(3185,2900) 3185,2910.82 3206.57,2932.4 3206.57,2933.01 3225,2951.43 3225,3009.62 R5.1
  Bottom Layer w20: P1.13 750,2050 2500,2050 2690,2240 2918.89,2240 3074.52,2395.63 3385.63,2395.63 3449.8,2459.8 3449.8,2716.8 3432.23,2734.37 3270.63,2734.37 3185,2820 v1(3185,2900)
pads on no net: D2.3 P1.6 P1.17 P1.18 P1.19 P1.20

## Polygon pours and split planes (outlines as drawn)
GND on Bottom Layer "GND_L02_P001" (solid, pour order 1): 0,3935 3935,3935 3935,0 0,0
GND on Top Layer "GND_L01_P000" (solid, pour order 0): 0,3935 3935,3935 3935,0 0,0

## Keep-outs
Keep-Out Layer:
  lines w10: 0,0 3935,0 3935,3935 0,3935 0,0

## Silkscreen, mask and mechanical layers (free items; w line width, h text height)
Top Overlay:
  lines w20: 1710,2087.5 1730,2067.5 2310,2067.5 2330,2087.5 2330,2262.5 2310,2282.5 1730,2282.5 1710,2262.5 1710,2087.5
  text "GND" at 564.65,3500.5 h40
  text "EnR2" at 760,3495 h40
  text "GND" at 2569.65,3490.5 h40
  text "EnL2" at 2765,3485 h40
  text "3.3V" at 420,3425 h40
  text "EnR1" at 640,3425 h40
  text "3.3V" at 2425,3415 h40
  text "EnL1" at 2645,3415 h40
  text "NAP TEAM" at 1780,2147.5 h60
  text "GND" at 53.32,1720 h40
  text "PWML" at 420,1715 h40
  text "GND" at 53.32,1615 h40
  text "PWMR" at 420,1610 h40
  text "GND" at 53.32,1515 h40
  text "DIRR" at 420,1510 h40
  text "DirS" at 20,1415 h40
  text "DIRL" at 420,1410 h40
  text "EnL2" at 400,1325 h40
  text "PulS" at 20,1315 h40
  text "EnL1" at 400,1195 h40
  text "GND" at 53.32,1115 h40
  text "EnR2" at 420,1110 h40
  text "5V" at 90,1005 h40
  text "EnR1" at 420,1005 h40
  text "GND" at 3545,600 h60 r90
  text "12V" at 3545,360 h60 r90
  text "GND" at 2835,50 h60
  text "Vin / 24V" at 3375.05,40 h60
Bottom Overlay:
  text "EN2 EN1 GND 3.3V" at 955,3755 h40
  text "EN4 EN3 GND 3.3V" at 2965,3755 h40
  text "OUT3 OUT4" at 1535,3570 h60
  text "OUT1 OUT2" at 3545,3560 h60
  text "3.3V GND" at 3905,3440 h40
  text "Bootrap_2" at 2606.66,2780 h50 r270
  text "Thermal" at 600,2769.84 h50 r270
  text "GND" at 725,2769.84 h50 r270
  text "PWML" at 855,2769.84 h50 r270
  text "DIRL" at 1017.48,2769.84 h50 r270
  text "Bootrap_1" at 1151.66,2769.84 h50 r270
  text "Thermal" at 2825,2769.84 h50 r270
  text "GND" at 2950,2769.84 h50 r270
  text "PWMR" at 3080,2769.84 h50 r270
  text "DIRR" at 3242.48,2769.84 h50 r270
  text "Bootrap_1" at 3376.66,2769.84 h50 r270
  text "Bootrap_2" at 366.66,2755 h50 r270
  text "12V" at 800,2221.6 h50 r270
  text "12V" at 3025,2206.6 h50 r270
  text "OUT3" at 1095,2179.95 h50 r270
  text "OUT1" at 3320,2164.95 h50 r270
  text "OUT4" at 515,2163.29 h50 r270
  text "OUT2" at 2740,2148.29 h50 r270
  text "Brake" at 950,2113.31 h50 r270
  text "Brake" at 3175,2098.31 h50 r270
  text "Current" at 670,2030 h50 r270
  text "Current" at 2895,2015 h50 r270
  text "GND" at 168.32,1715 h40
  text "PWML" at 560,1705 h40
  text "GND" at 1370,1615 h50
  text "Vin" at 1590,1615 h50
  text "Vout" at 1825,1615 h50
  text "GND" at 168.32,1610 h40
  text "PWMR" at 560,1600 h40
  text "GND" at 168.32,1510 h40
  text "DIRR" at 553.34,1500 h40
  text "DirS" at 168.32,1410 h40
  text "DIRL" at 553.34,1400 h40
  text "EnL2" at 560,1315 h40
  text "PulS" at 168.32,1310 h40
  text "FB" at 1450,1220 h50
  text "Vc" at 1675,1220 h50
  text "EnL1" at 546.67,1195 h40
  text "GND" at 168.32,1110 h40
  text "EnR2" at 560,1100 h40
  text "5V" at 155,1005 h40
  text "EnR1" at 546.67,995 h40
  text "GND" at 3575,590 h70 r270
  text "Power_Board_V2.0" at 2110,501.66 h100
  text "12V" at 3580,342.66 h70 r270
  text "GND" at 3187.34,315 h70
  text "24V" at 3480,315 h70

## Text inside footprints (layer, text, board x,y; h text height)
F1: Top Overlay "Fuse" at 2580,255 h60 r90
P1: Top Overlay "20" at 250,1990 h50 r90; Top Overlay "19" at 350,1990 h50 r90; Top Overlay "1" at 350,930 h50 r90; Top Overlay "2" at 250,925 h50 r90
P2: Top Overlay "GND" at 3765,2715 h50 r90; Top Overlay "3.3V" at 3880,2675 h50 r90; Top Overlay "9" at 3865,3400 h50 r90; Top Overlay "10" at 3765,3400 h50 r90
P3: Top Overlay "GND" at 410,795 h50; Top Overlay "5V" at 60,795 h50; Top Overlay "9" at 210,355 h50 r270; Top Overlay "10" at 310,355 h50 r270